# EAGLE board nodeVote (EAGLE 9.6.1)
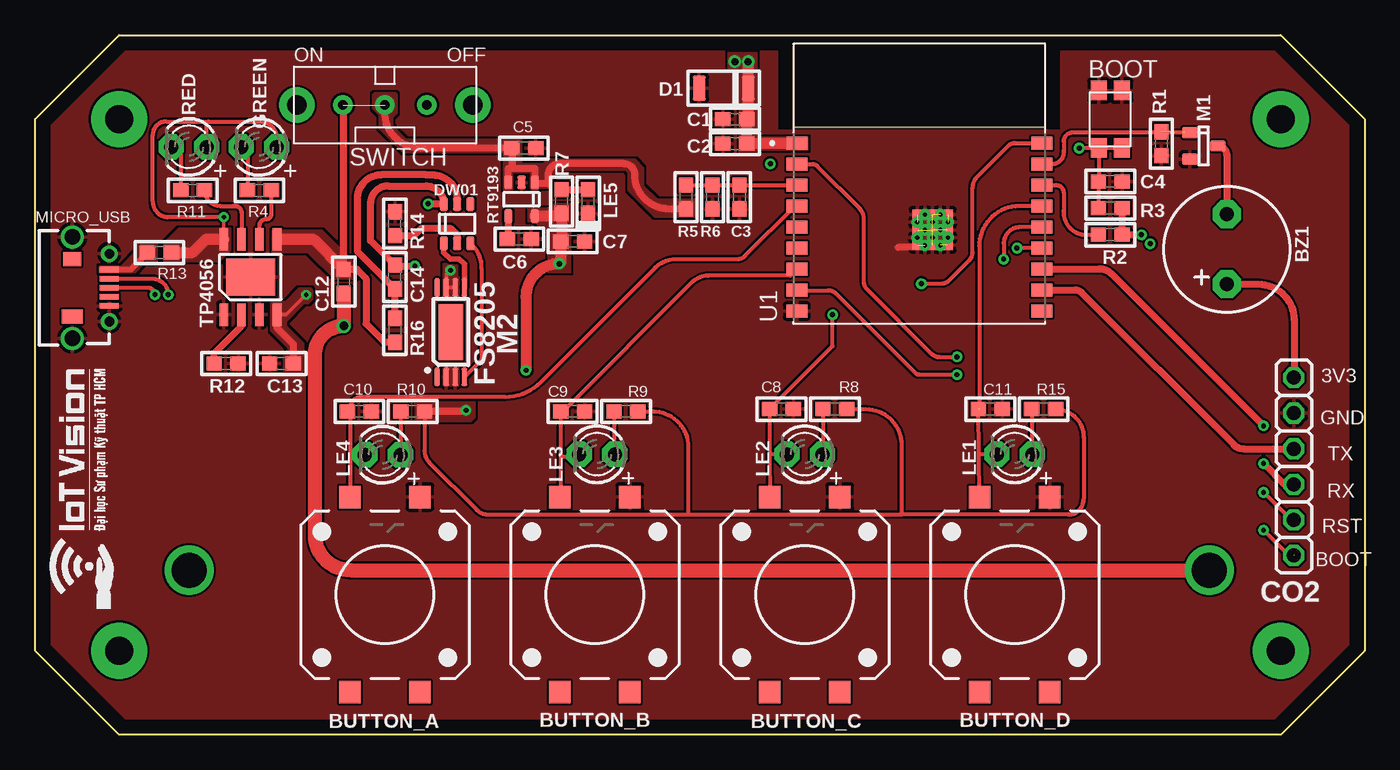
[diagram p0: board, top side]
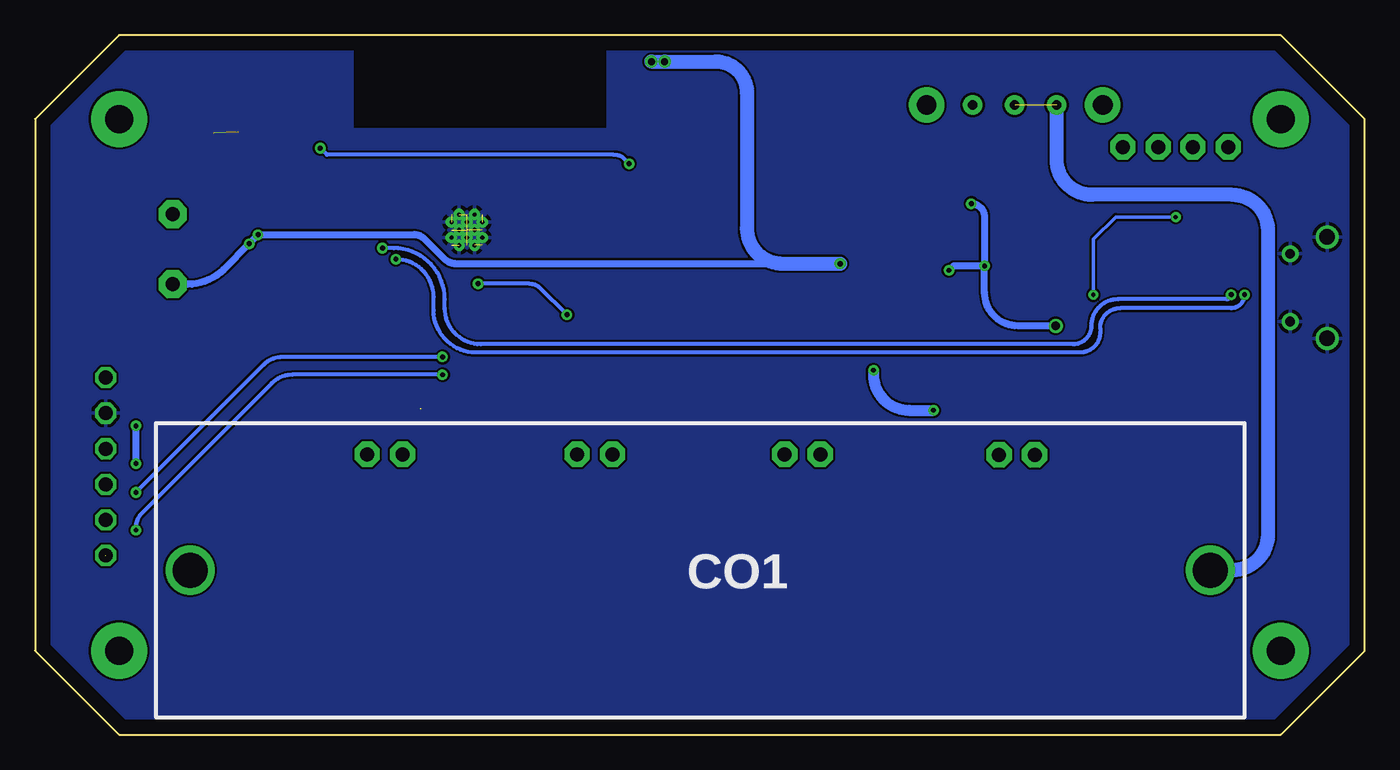
[diagram p1: board, bottom side, seen from below]

Size 95 x 50 mm. Coordinates in mm from the lower left corner, seen from the top.
Outline: 0,6 0,44 6,50 89,50 95,44 95,6 89,0 6,0 0,6
Copper layers (1*16): Top 0.035mm / dielectric 1.5mm / Bottom 0.035mm
Design rules "default *": minimum track width 6mil, minimum drill 0.35mm, track to track 6mil, track to pad 6mil, pad to pad 6mil, via to via 6mil, smd to smd 6mil, copper to edge 40mil, drill to drill 6mil, minimum pad ring 10mil, minimum via ring 8mil, stop-mask expansion 4mil, vias tented up to drill 1mm, thermal gap 10mil

## Footprints (pad centres in the part's own frame; a part is rotated, then mirrored left to right if it is on the bottom)
BT_3X4MM_2.5MM = smd 1.4 x 1.15: 1 -2.05,0.825; 2 -2.05,-0.825; 3 2.05,0.825; 4 2.05,-0.825
TACTILE_SWITCH_SMD_12MM = smd 1.6 x 1.55: 1 6.975,-2.5; 2 -6.975,-2.5; 3 6.975,2.5; 4 -6.975,2.5
BUZZER3 = drill 1 pad 2 octagon: + -2.5,0; - 2.5,0
0603 = smd 1.1 x 1: 1 -0.85,0; 2 0.85,0
18650_BAT = drill 2.5: + -36.45,0; - 36.45,0
6P_2.54MM = drill 1 octagon: 1 -6.35,0; 2 -3.81,0; 3 -1.27,0; 4 1.27,0; 5 3.81,0; 6 6.35,0
SOD-80 = smd 0.9 x 1.8: 1 0,0; 2 3.5,0
SOT23_6 = smd 0.6 x 1: 1 -0.95,-1.4; 2 0,-1.4; 3 0.95,-1.4; 4 0.95,1.4; 5 0,1.4; 6 -0.95,1.4
LED3MM = drill 1 pad 1.8 octagon: A -1.27,0; K 1.27,0
0603P = smd 1.1 x 1: 1 -0.85,0; 2 0.85,0
SOT23(1) = smd 0.8 x 1.1: 1 -0.95,-1; 2 0.95,-1; 3 0,1
TSSOP-8 = smd 0.4 x 1.3: 1 0,0; 2 0.65,0; 3 1.3,0; 4 1.95,0; 5 1.95,6.4; 6 1.3,6.4; 7 0.65,6.4; 8 0,6.4 | smd 1.75 x 4: TAB 0.978,3.2
MUSB = smd 0.4 x 1.35: 1 2.6,0; 2 1.95,0; 3 1.3,0; 4 0.65,0; 5 0,0 | drill 1.1: SH1 -2.325,2.65; SH2 4.925,2.65 | drill 0.7: SH3 -1.125,0; SH4 3.725,0 | smd 1 x 1.5: TAB1 -0.75,2.65 | smd 1 x 1.3: TAB2 3.35,2.65
SOT23_5 = smd 0.6 x 1: 1 -0.95,-1.2; 2 0,-1.2; 3 0.95,-1.2; 4 0.95,1.2; 5 -0.95,1.2
SS-12F23G4 = drill 0.7 pad 1.422: 1 -3,0; 2 0,0; 3 3,0 | drill 1.4 pad 2.54: MT1 -6.3,0; MT2 6.3,0
SOIC8E = smd 1.6 x 0.61: 1 -2.7,1.905; 2 -2.7,0.635; 3 -2.7,-0.635; 4 -2.7,-1.905; 5 2.7,-1.905; 6 2.7,-0.635; 7 2.7,0.635; 8 2.7,1.905 | smd 2.62 x 3.51: 9 0,0
MODULE_ESP32-C3-WROOM-02-H4 = smd 1.5 x 0.9: 1 -8.75,2.9; 2 -8.75,1.4; 3 -8.75,-0.1; 4 -8.75,-1.6; 5 -8.75,-3.1; 6 -8.75,-4.6; 7 -8.75,-6.1; 8 -8.75,-7.6; 9 -8.75,-9.1; 10 8.75,-9.1; 11 8.75,-7.6; 12 8.75,-6.1; 13 8.75,-4.6; 14 8.75,-3.1; 15 8.75,-1.6; 16 8.75,-0.1; 17 8.75,1.4; 18 8.75,2.9 | smd 0.7 x 0.7: 19 -0.14,-2.2; 20 0.96,-2.2; 21 2.06,-2.2; 22 -0.14,-3.3; 23 0.96,-3.3; 24 2.06,-3.3; 25 -0.14,-4.4; 26 0.96,-4.4; 27 2.06,-4.4 | drill 0.3 pad 0.4: 28 0.41,-2.2; 29 1.51,-2.2; 30 -0.14,-2.75; 31 0.96,-2.75; 32 2.06,-2.75; 33 0.41,-3.3; 34 1.51,-3.3; 35 -0.14,-3.85; 36 0.96,-3.85; 37 2.06,-3.85; 38 0.41,-4.4; 39 1.51,-4.4

## Placement (x,y rotation side)
BOOT  [BT_3X4MM_2.5MM]  76.83,43.97 270 top
BUTTON_A  SWITCH-SMD-12MM  [TACTILE_SWITCH_SMD_12MM]  25,10 90 top
BUTTON_B  SWITCH-SMD-12MM  [TACTILE_SWITCH_SMD_12MM]  40,10 90 top
BUTTON_C  SWITCH-SMD-12MM  [TACTILE_SWITCH_SMD_12MM]  55,10 90 top
BUTTON_D  SWITCH-SMD-12MM  [TACTILE_SWITCH_SMD_12MM]  70,10 90 top
BZ1  BUZZER3  [BUZZER3]  85.16,34.68 90 top
C1  10uF  [0603]  50.01,43.97 180 top
C2  100nF  [0603]  50.01,42.23 180 top
C3  100nF  [0603]  50.32,38.42 270 top
C4  1uF  [0603]  76.83,39.53 0 top
C5  1uF  [0603]  34.92,41.91 0 top
C6  1uF  [0603]  34.61,35.4 0 top
C7  1uF  [0603]  38.42,35.24 0 top
C8  100nF  [0603]  53.34,23.26 0 top
C9  100nF  [0603]  38.42,23.1 0 top
C10  100nF  [0603]  23.18,23.1 0 top
C11  100nF  [0603]  68.26,23.26 0 top
C12  10uF  [0603]  22.07,32.38 270 top
C13  10uF  [0603]  17.62,26.51 0 top
C14  0.1uF  [0603]  25.72,32.7 90 top
CO1  BATTERY_18650  [18650_BAT]  47.47,11.75 180 bottom
CO2  6P_2.54  [6P_2.54MM]  89.95,19.16 270 top
D1  ZENER  [SOD-80]  50.96,46.2 180 top
DW01  DW01  [SOT23_6]  30.16,36.51 0 top
GREEN  LED  [LED3MM]  16,42 180 top
LE1  LED  [LED3MM]  70,20.03 180 top
LE2  LED  [LED3MM]  55,20.03 180 top
LE3  LED  [LED3MM]  40.16,20.03 180 top
LE4  LED  [LED3MM]  24.84,20 180 top
LE5  LED0603  [0603P]  39.53,38.1 90 top
M1  MOSFETN  [SOT23(1)]  83.5,42.07 270 top
M2  FS8205  [TSSOP-8]  28.73,25.56 0 top
MICRO_USB  MICRO_USB  [MUSB]  5.32,30.64 90 top
R1  1M  [0603]  80.49,42.23 90 top
R2  10k  [0603]  76.83,35.72 0 top
R3  10k  [0603]  76.83,37.62 0 top
R4  1k  [0603]  16.03,38.89 180 top
R5  2k2  [0603]  46.51,38.42 270 top
R6  1k2  [0603]  48.42,38.42 90 top
R7  1k  [0603]  37.62,38.1 270 top
R8  1k5  [0603]  57.15,23.26 0 top
R9  1k5  [0603]  42.23,23.1 0 top
R10  1k5  [0603]  26.99,23.1 0 top
R11  1k  [0603]  11.27,38.89 180 top
R12  2k  [0603]  13.65,26.51 0 top
R13  0.4  [0603]  8.89,34.45 180 top
R14  1k  [0603]  25.72,36.51 90 top
R15  1k5  [0603]  72.07,23.26 0 top
R16  100  [0603]  25.72,28.89 270 top
RED  LED  [LED3MM]  11,42 180 top
RT9193  RT9193  [SOT23_5]  34.77,38.26 180 top
SWITCH  SS-12F23G4  [SS-12F23G4]  25,45 0 top
TP4056  TP4056  [SOIC8E]  15.4,32.7 90 top
U1  ESP32-C3-WROOM-02-N4  [MODULE_ESP32-C3-WROOM-02-H4]  63.18,39.37 0 top

## Library data of the parts
BOOT = 12-IoTVision_Button_Switch
BUTTON_A BUTTON_B BUTTON_C BUTTON_D = Uy_DIP; PROD_ID: SWCH-11967; SF_SKU: COM-12993
BZ1 CO1 CO2 D1 DW01 GREEN LE1-LE4 M2 RED TP4056 = Dkoi
C1-C14 LE5 M1 MICRO_USB R1-R16 RT9193 = Uy_SMD
SWITCH = SS-12F23G4
U1 = ESP32-C3-WROOM-02; AVAILABILITY: In Stock; DESCRIPTION: WiFi Modules (802.11) (Engineering Samples) SMD module, ESP32-C3, 4MB SPI flash, PCB antenna, -40 C +85 C; MF: Espressif Systems; MP: ESP32-C3-WROOM-02-N4; PACKAGE: Package; PRICE: None; PURCHASE-URL: https://pricing.snapeda.com/search?q=ESP32-C3-WROOM-02-N4&ref=eda

## Nets
3V3: BZ1.+ C1.1 C2.1 C7.1 CO2.1 D1.1 R2.2 R3.2 R7.2 R8.2 R9.2 R10.2 R15.2 RT9193.5 U1.1
ADC_BATT: C3.1 R5.1 R6.2 U1.3
BOOT: CO2.6 U1.8
BP: C6.1 RT9193.4
BT_A: BUTTON_A.3 C10.1 LE4.K U1.4
BT_B: BUTTON_B.3 C9.1 LE3.K U1.7
BT_C: BUTTON_C.3 C8.1 LE2.K U1.18
BT_D: BUTTON_D.3 C11.1 LE1.K U1.15
C_D+: MICRO_USB.3 U1.14
C_D-: MICRO_USB.2 U1.13
CHRG: R11.1 TP4056.7
CSB: U1.10
EN: BOOT.3 BOOT.4 C4.1 R3.1
GND: BOOT.1 BOOT.2 BUTTON_A.1 BUTTON_B.1 BUTTON_C.1 BUTTON_D.1 C1.2 C2.2 C3.2 C4.2 C5.2 C6.2 C7.2 C8.2 C9.2 C10.2 C11.2 C13.1 CO2.2 D1.2 LE5.1 M1.2 M2.2 M2.3 MICRO_USB.5 MICRO_USB.SH1 MICRO_USB.SH2 MICRO_USB.SH3 MICRO_USB.SH4 R1.1 R6.1 R12.2 R14.2 RT9193.2 TP4056.1 TP4056.3 TP4056.9 U1.9 U1.19 U1.20 U1.21 U1.22 U1.23 U1.24 U1.25 U1.26 U1.27 U1.28 U1.29 U1.30 U1.31 U1.32 U1.33 U1.34 U1.35 U1.36 U1.37 U1.38 U1.39
IO1: M1.1 R1.2 U1.17
IO2: R2.1 U1.16
MOSI: U1.6
N$1: BZ1.- M1.3
N$2: LE1.A R15.1
N$3: LE2.A R8.1
N$4: LE3.A R9.1
N$5: LE4.A R10.1
N$6: MICRO_USB.1 R13.2
N$8: LE5.2 R7.1
N$9: GREEN.K R4.2
N$10: R11.2 RED.K
N$13: R12.1 TP4056.2
N$18: DW01.2 R14.1
N$19: C12.2 C14.2 CO1.- DW01.6 M2.6 M2.7
N$20: C14.1 DW01.5 R16.1
OC: DW01.3 M2.4
OD: DW01.1 M2.5
RST: CO2.5 U1.2
RX: CO2.4 U1.12
SCLK: U1.5
STDBY: R4.1 TP4056.6
TX: CO2.3 U1.11
VBAT: C5.1 C12.1 CO1.+ R5.2 R16.2 RT9193.1 RT9193.3 SWITCH.1 SWITCH.2 TP4056.5
VBUS: C13.2 GREEN.A R13.1 RED.A TP4056.4 TP4056.8

## Tracks (layer width: path | path; a pad name or v marks a point on that pad's centre or on a via)
3V3  (via drill 0.35, 0.4, 0.5)
  Top 0.3: R10.2 27.84,20.27 arc45 28.18,19.45 31.57,16.05 arc45 32.38,15.72 46.67,15.72 | 46.67,15.72 61.91,15.72 | 61.91,15.72 73.87,15.72 arc45 74.59,16.01 arc45 74.93,16.83 74.93,21.25 arc90 R15.2 | R9.2 44.13,23.1 arc-90 46.67,20.56 46.67,15.72 | R8.2 59.37,23.26 arc-90 61.91,20.72 61.91,15.72 | 89.97,25.53 arc45 CO2.1
  Top 0.5: R3.2 R2.2 v79.06,35.72 | v30.8,23.18 arc-90 30.72,23.1 R10.2 | BZ1.+ 87.42,32.18 arc-90 89.97,29.64 89.97,25.53
  Top 0.8: v50.96,48.1 D1.1 50.96,44.08 C1.1 C2.1 50.9,42.27 U1.1 | v35.08,26.04 35.08,31.27 arc-90 v37.47,33.66 37.57,33.76 C7.1 arc45 37.62,35.38 R7.2 arc-45 37.16,37.06 RT9193.5
  Bottom 0.5: v37.47,33.66 64.93,33.66 arc45 65.74,33.99 67.13,35.38 arc-45 67.94,35.72 v79.06,35.72 v79.69,35.08 81.53,33.24 arc45 84.09,32.18 BZ1.+
  Bottom 0.8: v35.08,26.04 35.08,25.72 arc-90 32.54,23.18 v30.8,23.18
  Bottom 1: v50.96,48.1 v50.01,48.1 46.35,48.1 arc90 44.13,45.88 44.13,36.2 arc-90 41.59,33.66 v37.47,33.66
  pour Top (no thermals): 35.24,37.62 35.24,36.67 35.72,36.67 36.67,35.72 36.67,33.02 38.26,33.02 38.26,37.94 37.15,37.94 36.83,37.62
  pour Top (no thermals): 27.15,23.65 27.15,22.54 27.3,22.38 31.11,22.38 31.43,22.7 31.43,23.81 27.3,23.81
  pour Top (no thermals): 49.53,48.74 51.59,48.74 51.59,42.7 55.24,42.7 55.24,41.75 51.59,41.75 51.59,41.59 50.32,41.59 50.32,47.62 49.53,47.62
ADC_BATT
  Top 0.3: R5.1 R6.2 C3.1 U1.3
  Top 0.5: U1.3
BOOT  (via drill 0.35)  (1 unrouted)
  Top 0.3: U1.8 54.45,31.75 56.67,31.75 arc-45 57.22,31.52 62.91,25.83 arc45 63.18,25.72 v65.88,25.72 | v87.79,14.61 89.59,12.8 89.97,12.8
  Top 0.5: U1.8 54.41,31.75
  Bottom 0.3: v65.88,25.72 76.59,25.72 arc-45 78.09,25.1 87.39,15.8 arc-45 87.79,14.84 v87.79,14.61
BP
  Top 0.5: RT9193.4 33.82,35.46 C6.1
BT_A
  Top 0.3: U1.4 54.3,37.77 50.75,34.22 arc-45 50.16,33.97 45.76,33.97 arc45 44.34,33.38 36.15,25.19 arc-45 33.58,24.13 23.36,24.13 arc90 22.48,23.25 C10.1 arc-90 22.5,22.93 22.5,19.84 | 22.5,19.84 BUTTON_A.3 | LE4.K arc-90 23.41,19.84 22.5,19.84
BT_B
  Top 0.3: U1.7 53.96,32.79 48.1,32.79 arc45 46.92,32.31 37.72,23.1 C9.1 37.57,19.84 | 37.57,19.84 37.57,17.04 | LE3.K arc-90 38.7,19.84 37.57,19.84
  Top 0.5: 37.57,17.04 BUTTON_B.3
BT_C  (via drill 0.35)
  Top 0.152: LE2.K 53.7,20
  Top 0.3: 52.49,20 C8.1 56.99,27.76 v56.99,30 | 52.49,20 BUTTON_C.3 | v63.34,32.23 64.77,32.23 arc45 65.31,32.45 66.77,33.91 arc45 66.99,34.45 66.99,39.08 arc-45 67.31,39.85 69.54,42.08 arc-45 70.01,42.27 U1.18 | 53.7,20 52.49,20 | 52.49,20
  Bottom 0.3: v56.99,30 58.9,31.91 arc-45 59.66,32.23 v63.34,32.23
BT_D  (1 unrouted)
  Top 0.3: U1.15 70.33,37.77 arc90 67.47,34.91 67.47,23.28 | 67.45,20 BUTTON_D.3 | 67.45,20 67.4,23.25 C11.1 | LE1.K 68.7,20 67.45,20
C_D+  (via drill 0.35)
  Top 0.3: U1.14 70.4,36.27 arc90 69.22,35.08 v69.22,33.97 | MICRO_USB.3 8.07,31.93 arc-90 v8.57,31.43
  Bottom 0.3: 9.52,30.48 9.53,30.48 | 9.53,30.48 17.46,30.48 arc-90 18.89,29.05 18.89,28.73 arc90 20.32,27.3 63.5,27.3 arc90 66.52,30.32 66.52,31.27 arc-90 v69.22,33.97 | v8.57,31.43 arc90 9.53,30.48
C_D-  (via drill 0.35)
  Top 0.3: U1.13 v70.17,34.77 | MICRO_USB.2 8.37,32.59 | 8.37,32.59 8.38,32.59 | 8.37,32.59 arc-90 v9.53,31.43
  Bottom 0.3: v9.53,31.43 arc90 9.84,31.11 17.62,31.11 arc-90 19.53,29.21 19.53,29.2 arc90 20.83,27.89 63.14,27.89 arc90 65.72,30.48 65.72,31.11 arc-90 69.37,34.77 v70.17,34.77
CHRG
  Top 0.3: TP4056.7 14.76,37.31 arc90 14.29,37.78 14.13,37.78 13.23,37.78 arc-90 R11.1
EN  (via drill 0.35)
  Top 0.3: BOOT.3 BOOT.4 | BOOT.4 76.01,39.55 C4.1 R3.1 | BOOT.4 74.63,41.92 v74.61,41.91
  Bottom 0.3: v52.55,40.8 52.94,41.2 arc-45 53.52,41.43 53.66,41.43 74.14,41.43 v74.61,41.91
GND  (13 unrouted)
  Top 0.5: U1.38 63.45,34.83 61.69,34.83
  pour Top (rank 2): 0,43.97 6.03,50.01 53.02,50.01 53.02,43.18 73.34,43.18 73.34,50.01 88.9,50.01 94.93,43.97 94.93,6.03 88.9,0 6.03,0 0,6.03
  pour Top (no thermals): 29.21,26.19 30.32,26.19 30.32,24.92 29.21,24.92
  pour Bottom: 0,43.97 6.03,50.01 88.9,50.01 89.06,49.85 94.93,43.97 94.93,43.81 94.93,6.03 88.9,0 6.03,0 0,6.03
IO1  (1 unrouted)
  Top 0.3: U1.17 72.68,40.77 arc90 73.5,41.59 73.5,41.75 73.5,42.39 arc-90 74.14,43.02 M1.1 82.23,43.02
IO2
  Top 0.3: U1.16 72.97,39.27 arc-90 73.5,38.73 73.5,37.47 73.5,37.31 arc90 75.09,35.72 R2.1
N$1
  Top 0.5: M1.3 arc-90 85.16,41.41 BZ1.-
N$2
  Top 0.3: LE1.A 71.22,20.77 R15.1
N$3
  Top 0.3: R8.1 56.3,20.03 LE2.A
N$4
  Top 0.3: R9.1 41.38,20.08 arc90 LE3.A
N$5
  Top 0.3: R10.1 26.14,20.03 arc90 LE4.A
N$6
  Top 0.4: MICRO_USB.1 6.83,33.23 R13.2
  pour Top (no thermals): 4.6,33.5 6.19,33.5 7.3,34.61 7.3,35.08 8.73,35.08 8.73,33.81 8.57,33.66 7.78,33.66 7.14,33.02 4.6,33.02
N$8
  Top 0.5: R7.1 LE5.2
N$9
  Top 0.3: GREEN.K 15.18,42 R4.2
N$10
  Top 0.3: RED.K 10.42,42 R11.2
N$13
  Top 0.5: R12.1 12.8,27.25 14.76,29.21 TP4056.2
N$15  (via drill 2 pad 4)
  other vias: 6,6
N$16  (via drill 2 pad 4)
  other vias: 6,44
N$18
  Top 0.5: R14.1 27.09,35.66 27.62,36.2 29.69,36.2 30.16,35.72 DW01.2
N$19  (via drill 0.35, 0.6)
  Top 0.3: M2.6 M2.7 29.38,32.88 v29.69,33.18
  Top 0.5: v28.1,37.94 28.13,37.91 DW01.6 arc90 27.91,39.21 25.24,39.21 arc90 23.97,37.94 23.97,35.3 C14.2 25.77,33.5 v27.15,33.5
  Top 1: C12.2 v22.07,29.21 arc90 20,27.15 20,14.29 arc90 22.54,11.75 CO1.-
  Bottom 0.5: v22.07,29.21 24.77,29.21 arc90 27.15,31.59 v27.15,33.5 | v27.15,33.5 29.37,33.5 v29.69,33.18 | v27.15,33.5 27.15,36.99 arc-90 v28.1,37.94
  pour Top (no thermals): 29.21,32.7 29.21,33.66 30.16,33.66 30.16,32.7 30.32,32.7 30.32,31.27 29.21,31.27
N$20
  Top 0.5: R16.1 C14.1 23.02,34.55 23.02,34.92 23.02,38.26 arc-90 24.77,40.01 27.94,40.01 28.4,40.01 arc-90 30.16,38.24 DW01.5
N$21  (via drill 2 pad 4)
  other vias: 89,44
N$22  (via drill 2 pad 4)
  other vias: 89,6
OC
  Top 0.3: DW01.3 31.29,34.94 arc-45 31.91,33.44 31.91,33.34 31.91,26.78 M2.4
OD
  Top 0.4: DW01.1 29.21,34.45 29.69,33.97 30.32,33.97 30.68,33.61 M2.5
RST  (via drill 0.35)
  Top 0.3: U1.2 55.56,40.77 arc-45 55.88,40.64 58.9,37.62 arc-45 59.21,36.86 59.21,32.38 arc45 59.44,31.84 64.07,27.21 arc45 64.61,26.99 v65.88,26.99 | v87.79,17.3 89.72,15.37 arc-45 89.78,15.35 CO2.5
  Bottom 0.3: v65.88,26.99 77.31,26.99 77.32,26.99 arc-45 78.66,26.43 v87.79,17.3
RX  (via drill 0.35)
  Top 0.5: U1.12 76.04,33.27 arc-45 76.97,32.89 v87.79,22.07 | v87.79,19.37 89.27,17.89 CO2.4
  Bottom 0.5: v87.79,22.07 v87.79,19.37
STDBY
  Top 0.3: R4.1 16.88,37.2 arc-90 16.51,36.83 arc90 16.03,36.35 16.03,36.04 TP4056.6
TX
  Top 0.5: U1.11 74.34,31.77 arc-45 74.77,31.59 85.65,20.72 arc45 86.34,20.43 CO2.3
VBAT  (1 unrouted)
  Top 0.5: R16.2 24.98,28.04 23.65,29.37 23.65,32.6 23.02,33.23 C12.1 22.07,44.62 SWITCH.1 | RT9193.3 33.82,40.48 34.13,40.48 | 34.13,40.48 35.72,40.48 RT9193.1 arc90 35.8,39.37 36.67,39.37 36.67,40.01 arc-90 37.47,40.8 42.07,40.8 arc-90 42.86,40.01 arc90 45.3,37.57 R5.2 | SWITCH.2 25,44.45 arc90 27.54,41.91 C5.1 34.08,40.54 arc90 34.13,40.48
  Top 0.8: TP4056.5 19.9,35.4 C12.1
  Bottom 1: 21.84,45 SWITCH.1 22,41.12 arc-90 19.46,38.58 9.44,38.58 arc90 6.9,36.04 6.9,14.29 arc90 9.44,11.75 CO1.+
  pour Top (no thermals): 16.99,36.04 20.48,36.04 22.86,33.66 22.86,32.54 21.43,32.54 19.53,34.45 16.99,34.45
  pour Top (no thermals): 33.5,42.55 34.77,42.55 34.77,40.8 36.35,40.8 36.67,41.12 42.86,41.12 43.5,40.48 43.5,39.21 44.45,38.26 47.15,38.26 47.15,36.99 44.29,36.99 43.02,38.26 42.39,38.89 42.39,40.16 42.23,40.32 37.47,40.32 36.99,39.85 36.99,39.69 36.99,39.21 36.83,39.05 36.04,39.05 35.88,38.89 35.56,38.89 35.4,39.05 35.4,40.16 34.13,40.16 34.13,38.89 33.5,38.89 33.5,41.59 26.35,41.59 24.92,43.02 24.61,43.34 24.61,44.29 24.13,44.77 24.13,45.72 24.29,45.88 25.56,45.88 25.72,45.88 25.88,45.72 25.88,44.61 25.88,44.45 25.56,44.13 25.56,43.5 26.04,43.02 26.35,42.7 26.51,42.55 26.83,42.55 33.34,42.55
VBUS  (via drill 0.3, 0.3 pad 0.55)
  Top 0.25: v13.49,36.99 TP4056.8 | TP4056.4 17.94,30 v19.37,31.43
  Top 0.3: v13.49,36.99 9.53,36.99 arc-90 8.41,38.1 8.41,42.86 arc-90 9.37,43.81 12.38,43.81 | 12.38,43.81 16.03,43.81 arc-90 17.3,42.55 GREEN.A | RED.A 12.27,43.7 12.38,43.81
  Top 0.5: C13.2 18.47,27.88 17.3,29.05 TP4056.4
  Top 0.8: TP4056.8 12.22,35.4 11.27,34.45 R13.1
  Bottom 0.25: v19.37,31.43 19.37,35.4 17.78,36.99 v13.49,36.99
  pour Top (no thermals): 9.21,35.08 10.32,36.2 13.97,36.2 13.97,34.61 13.18,33.81 9.21,33.81
  pour Top (no thermals): 17.78,26.04 17.78,27.15 18.1,27.46 18.1,27.62 16.83,28.89 16.83,30.8 16.99,30.96 17.94,30.96 18.89,31.91 19.68,31.91 19.84,31.75 19.84,31.27 19.84,31.11 19.53,30.8 19.21,30.8 17.94,29.53 17.94,29.21 19.21,27.94 19.21,26.04 19.05,25.88 17.78,25.88

## Text on the board
tPlace: ON | OFF | C5 | R11 | R4 | R13 | C10 | R10 | C9 | R9 | C8 | R8 | C11 | R15 | 3V3 | GND | TX | RX | RST | BOOT
201bmp: C:/Users/ADMIN/OneDrive - Unicorn/Documents/EAGLE/libraries/IoTVision-Logo.bmp